# Altium PCB PCB_ESP32-C3-MINI-1_V1.1_20200929.PcbDoc
Units mil, origin at the board's own origin, x right, y up, seen from the top; angles counter-clockwise.
Board outline 519.69 x 653.54 mil, 4 copper layers (Top, Gnd, Power, Bottom), stack 35.4 mil thick; 22 components, 27 nets, 138 pads, 79 vias.
Unrouted connection lines stored in the file: 74.
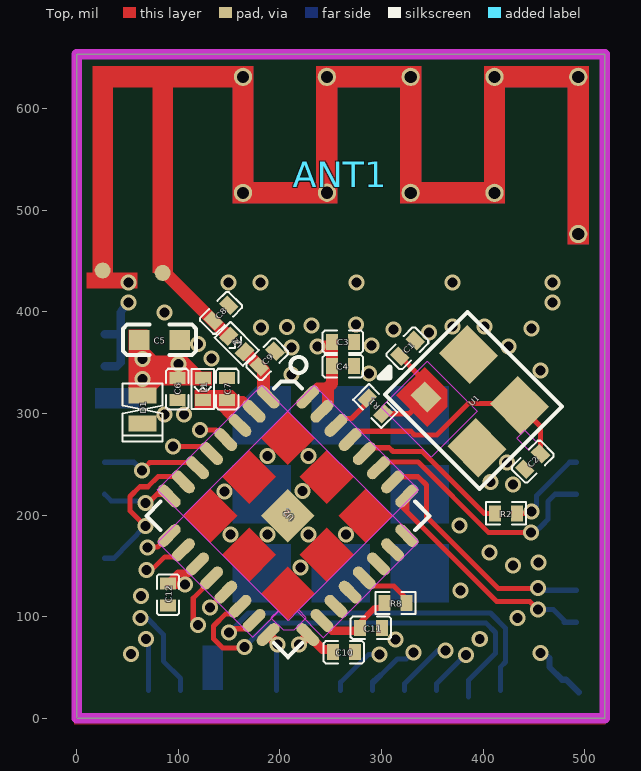
[diagram p0: Top view]
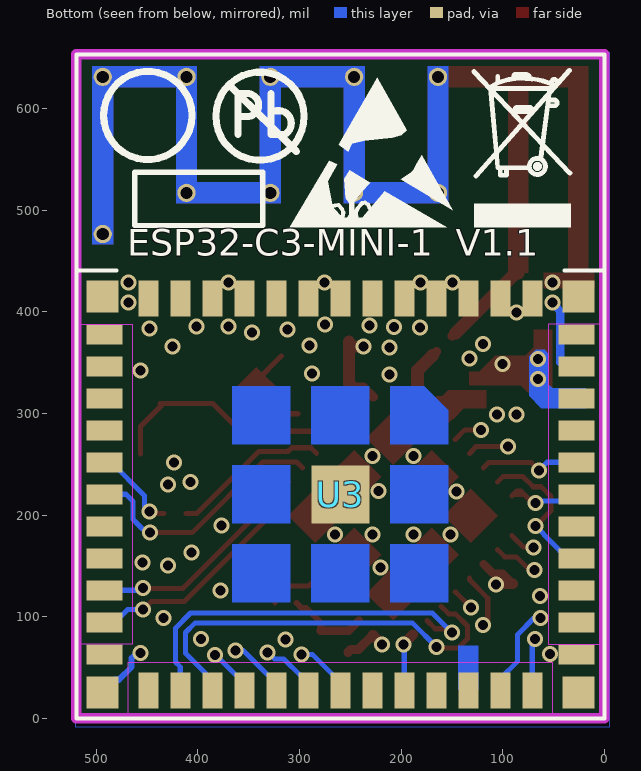
[diagram p1: Bottom view, seen from below]
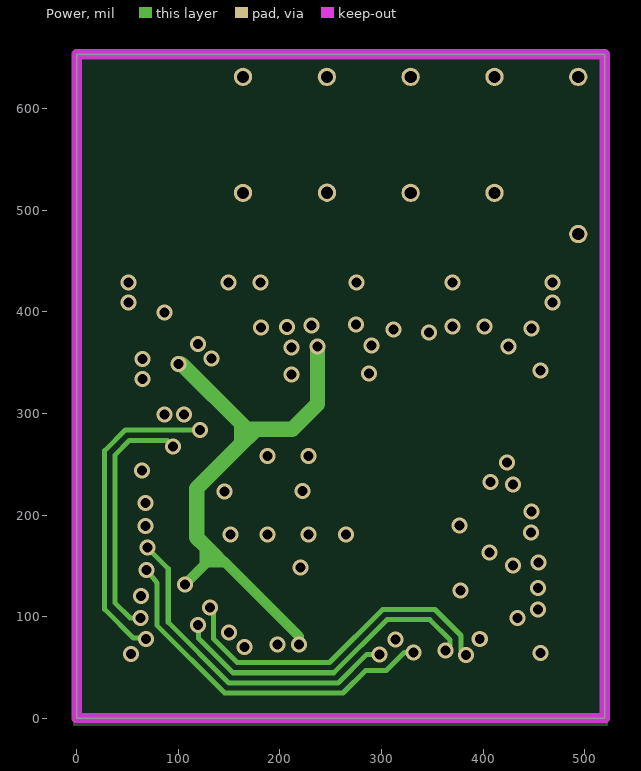
[diagram p2: Power]

## Layer stack, top to bottom
Solder Mask Top: solder mask 0.4, Solder Resist, Dk 3.5
Top: signal copper 1.35
Dielectric 1: dielectric 10, FR-4, Dk 4.3
Gnd: signal copper 1.35
Dielectric2: dielectric 10, FR-4, Dk 4.3
Power: signal copper 1.35
Dielectric3: dielectric 10, FR-4, Dk 4.3
Bottom: signal copper 1.35
Solder Mask Bottom: solder mask 0.4, Solder Resist, Dk 3.5

## Board outline
0,653.54 519.69,653.54 519.69,0 0,0

## Design rules (kind name [scope] priority, off if disabled: settings)
Clearance "Clearance - NetClass - ClearanceClass_2(RuleSet)" [InNetClass('ClearanceClass_2(RuleSet)')] p1: gap=5 ignorepadtopadclearanceinfootprint=FALSE except(0: Arc-Hole Track-Hole SMDPad-Hole THPad-Hole Via-Hole Fill-Hole Poly-Hole Region-Hole Text-Hole; 10: Fill-Fill Fill-Poly Fill-Region Poly-Poly Poly-Region Region-Region Text-Text; 12.2: Arc-Fill Arc-Poly Arc-Region Track-Fill Track-Poly Track-Region SMDPad-Fill SMDPad-Poly SMDPad-Region THPad-Fill THPad-Poly THPad-Region Via-Fill Via-Poly Via-Region)
Clearance "Clearance - Default - DEFAULT- SMD" [IsVia vs IsSMTPin] p2: gap=6 ignorepadtopadclearanceinfootprint=FALSE
Clearance "Clearance - Default - DEFAULT - Via" [IsVia vs IsVia] p3: gap=6 ignorepadtopadclearanceinfootprint=FALSE
Clearance "Clearance - Default - DEFAULT - Net" [All] p4: gap=5 ignorepadtopadclearanceinfootprint=FALSE except(0: Arc-Hole Track-Hole SMDPad-Hole THPad-Hole Via-Hole Fill-Hole Poly-Hole Region-Hole Text-Hole; 7.87: SMDPad-SMDPad SMDPad-THPad THPad-THPad; 10: Fill-Fill Fill-Poly Fill-Region Poly-Poly Poly-Region Region-Region Text-Text)
ComponentClearance "ComponentClearance - Default - DEFAULT" [All] p1: gap=6 collisioncheckmode=3 verticalgap=10 showdistances=FALSE
FanoutControl Fanout_Small [(CompPinCount < 5)] p1: bgadir=Out bgaviamode=Centered fanoutstyle=Auto fanoutdirection=OutThenIn viagrid=1 // Fanout_Small (Default Rule)
FanoutControl Fanout_BGA [IsBGA] p2: bgadir=Out bgaviamode=Centered fanoutstyle=Auto fanoutdirection=Alternating viagrid=1 // Fanout_BGA (Default Rule)
FanoutControl Fanout_LCC [IsLCC] p3: bgadir=Out bgaviamode=Centered fanoutstyle=Auto fanoutdirection=Alternating viagrid=1 // Fanout_LCC (Default Rule)
FanoutControl Fanout_SOIC [IsSOIC] p4: bgadir=Out bgaviamode=Centered fanoutstyle=Auto fanoutdirection=Alternating viagrid=1 // Fanout_SOIC (Default Rule)
HoleToHoleClearance "HoleToHoleClearance - Default - DEFAULT" [All] p1: gap=6 allowstackedmicrovias=TRUE
Length "Default Length" [All] p1: maxlimit=50000 minlimit=0
MaxMinImpedance "Default Impedance" [All] p1: minimum=50.00 maximum=150.0
ParallelSegment "Default Parallel Segment Adjasent" [All] p1: limit=1000 gap=200
ParallelSegment "Default Parallel Segment Same Layer" [All] p2: limit=1000 gap=200
PlaneConnect "Default PlaneConnect" [All] p1: planeconnectstyle=Direct reliefexpansion=20 reliefentries=4 reliefconductorwidth=15 reliefairgap=10
PolygonConnect "PolygonConnect - Default SMT" [IsSMTPin] p1: connectstyle=Direct reliefconductorwidth=10 reliefentries=4 polygonreliefangle="45 Angle" airgapwidth=10
PolygonConnect "PolygonConnect - Default Pad" [All] p2: connectstyle=Direct reliefconductorwidth=15 reliefentries=4 polygonreliefangle="45 Angle" airgapwidth=10
RoutingLayers "RoutingLayers - Default - DEFAULT" [All] p1: top layer_v5=TRUE mid layer 1_v5=TRUE mid layer 2_v5=TRUE bottom layer_v5=TRUE
RoutingPriority "RoutingPriority - Default - DEFAULT" [All] p1: routingpriority=3
RoutingTopology "Default Routing Topology" [All] p1: topology=Shortest
RoutingVias "RoutingVias - Default - DEFAULT" [All] p1: holewidth=9.84 width=15.75 viastyle="Through Hole" minholewidth=9.84 minwidth=15.75 maxholewidth=9.84 maxwidth=15.75
SMDToCorner "SMDToCorner - Default - DEFAULT" [All] p1: distance=60000
SolderMaskExpansion [All] p1: expansion=4 istentingtop=FALSE
Width "Width - NetClass - ClearanceClass_2(RuleSet)" [InNetClass('ClearanceClass_2(RuleSet)')] p1: maxlimit=30 minlimit=5 preferedwidth=12.6
Width "Default Width" [All] p2: maxlimit=30 minlimit=5 preferedwidth=5
18 further rules are at their usual default settings.

## Classes and differential pairs
net class ClearanceClass_2(RuleSet): LNA_IN RF_ANT

## Components (designator, comment, footprint, x,y, rotation, side; value= is the part's Value field where it differs from the comment)
ANT1 "MINI-ANT-TYPED-H" MINI-ANT-TYPED-H 0,653.54 r0 top
C1 "C0201" C0201 325.51,364.15 r45 top
C2 "C0201" C0201 448.81,252.66 r225 top
C3 "C0201" C0201 262,370.6 r0 top
C4 "C0201" C0201 262,346.5 r0 top
C5 "C0402" C0402 81.5,372.39 r0 top
C6 "C0201" C0201 99,324.02 r270 top
C7 "C0201" C0201 148.16,324.02 r90 top
C8 "C0201" C0201 142,399 r225 top
C9 "C0201" C0201 187.5,353.5 r225 top
C10 "C0201" C0201 263,65 r0 top
C11 "C0201" C0201 289.5,89 r0 top
C12 "C0201" C0201 89.9,121.6 r270 top
D1 "SOD882" SOD882 64.96,304 r270 top
L1 "L0201" L0201 124.2,324.02 r90 top
L2 "L0201" L0201 157.5,368.5 r135 top
R1 "R0201" R0201 293.8,307.4 r315 top
R2 "R0201" R0201 422.49,201.7 r0 top
R8 "R0201" R0201 313.78,113.5 r180 top
U1 "XTAL3225" XTAL3225 389.76,312.14 r315 top
U2 "QFN32_0P5_5" QFN32_0P5_5 207.94,199.28 r315 top
U3 "QFN48_0P8_11P8X9P8" QFN48_0P8_11P8X9P8 519.69,0 r180 bottom

## Footprints (in the part's own frame and the unit in brackets; to place one, negate y for a bottom-side part, rotate by r counter-clockwise, add the part's x,y. Pads: shape width x height; smd on the part's side, far side on the other; paste and mask are expansions set on the pad)
C0201 [mm]
  rect 0.3x0.4 smd: 1(-0.275,0) 2(0.275,0)
  silkscreen extent -0.51,-0.28 0.51,0.28
C0402 [mil]
  rect 20x20 smd: 1(-20,0) 2(20,0)
  silkscreen extent -36,-15 36,15
L0201 [mm]
  rect 0.3x0.4 smd: 1(-0.275,0) 2(0.275,0)
  silkscreen extent -0.5,-0.28 0.5,0.28
MINI-ANT-TYPED-H [mil]
  round 15.75 smd paste-7.87: 1(84.62,-215.21) 2(25.56,-212.8)
  round 18 hole 12 mask-9: 3(163.68,-22.25) 4(163.68,-136.43) 5(246.39,-136.23) 6(246.23,-22.25) 7(328.71,-22.25) 8(328.71,-136.42) 9(411.19,-136.42) 10(411.19,-22.25) 11(493.67,-22.25) 12(493.67,-176.97)
  Top region: 15.72,-212.8 35.4,-212.8 35.4,-32.48 74.77,-32.48 74.77,-215.21 94.46,-215.21 94.46,-32.48 153.51,-32.48 153.51,-146.66 256.46,-146.66 256.46,-32.48 318.47,-32.48 318.47,-146.66 421.42,-146.66 421.42,-32.48 483.43,-32.48 483.43,-187.21 503.9,-187.21 503.9,-12.01 400.95,-12.01 400.95,-126.18 338.94,-126.18 338.94,-12.01 235.99,-12.01 235.99,-126.18 173.98,-126.18 173.98,-12.01 15.72,-12.01 15.72,-212.8
  Bottom region: 153.51,-12.01 153.51,-146.66 256.46,-146.66 256.46,-32.48 318.47,-32.48 318.47,-146.66 421.42,-146.66 421.42,-32.48 483.43,-32.48 483.43,-187.21 503.9,-187.21 503.9,-12.01 400.95,-12.01 400.95,-126.18 338.94,-126.18 338.94,-12.01 235.99,-12.01 235.99,-126.18 173.98,-126.18 173.98,-12.01 153.51,-12.01
QFN32_0P5_5 [mm]
  oval 0.7x0.28 smd: 1(-2.45,1.75) 2(-2.45,1.25) 3(-2.45,0.75) 4(-2.45,0.25) 5(-2.45,-0.25) 6(-2.45,-0.75) 7(-2.45,-1.25) 8(-2.45,-1.75) 17(2.45,-1.75) 18(2.45,-1.25) 19(2.45,-0.75) 20(2.45,-0.25) 21(2.45,0.25) 22(2.45,0.75) 23(2.45,1.25) 24(2.45,1.75)
  oval 0.28x0.7 smd: 9(-1.75,-2.45) 10(-1.25,-2.45) 11(-0.75,-2.45) 12(-0.25,-2.45) 13(0.25,-2.45) 14(0.75,-2.45) 15(1.25,-2.45) 16(1.75,-2.45) 25(1.75,2.45) 26(1.25,2.45) 27(0.75,2.45) 28(0.25,2.45) 29(-0.25,2.45) 30(-0.75,2.45) 31(-1.25,2.45) 32(-1.75,2.45)
  rect 0.95x0.95 smd: 33(0,0)
  Top region: -0.9,-0.475 -1.85,-0.475 -1.85,0.475 -0.9,0.475 -0.9,-0.475
  Top region: -0.9,-1.85 -1.85,-1.85 -1.85,-0.9 -0.9,-0.9 -0.9,-1.85
  Top region: 0.475,-1.85 -0.475,-1.85 -0.475,-0.9 0.475,-0.9 0.475,-1.85
  Top region: 0.9,-0.9 1.85,-0.9 1.85,-1.85 0.9,-1.85 0.9,-0.9
  Top region: 1.85,-0.475 0.9,-0.475 0.9,0.475 1.85,0.475 1.85,-0.475
  Top region: 0.9,1.85 1.85,1.85 1.85,0.9 0.9,0.9 0.9,1.85
  Top region: 0.475,0.9 -0.475,0.9 -0.475,1.85 0.475,1.85 0.475,0.9
  Top region: -0.9,0.9 -1.85,0.9 -1.85,1.85 -0.9,1.85 -0.9,0.9
  Top keep-out region: -1.837,-1.85 -1.836,-2.775 1.524,-2.775 1.524,-1.85 -1.837,-1.85
  Top keep-out region: 1.85,1.85 1.85,-1.529 2.775,-1.529 2.775,1.85 1.85,1.85
  Top keep-out region: -2.775,1.85 -1.85,1.85 -1.85,-1.85 -2.775,-1.85 -2.775,1.85
  Top keep-out region: -1.85,1.85 1.85,1.85 1.85,2.775 -1.85,2.775 -1.85,1.85
  silkscreen extent -2.68,-2.5 2.5,3.05
QFN48_0P8_11P8X9P8 [mm]
  rect 0.9x0.5 smd paste-0.05 mask-0.05: 1(12.5,9.6) 2(12.5,8.8) 3(12.5,8) 4(12.5,7.2) 5(12.5,6.4) 6(12.5,5.6) 7(12.5,4.8) 8(12.5,4) 9(12.5,3.2) 10(12.5,2.4) 11(12.5,1.6) 25(0.7,1.6) 26(0.7,2.4) 27(0.7,3.2) 28(0.7,4) 29(0.7,4.8) 30(0.7,5.6) 31(0.7,6.4) 32(0.7,7.2) 33(0.7,8) 34(0.7,8.8) 35(0.7,9.6)
  rect 0.5x0.9 smd paste-0.05 mask-0.05: 12(11.4,0.7) 13(10.6,0.7) 14(9.8,0.7) 15(9,0.7) 16(8.2,0.7) 17(7.4,0.7) 18(6.6,0.7) 19(5.8,0.7) 20(5,0.7) 21(4.2,0.7) 22(3.4,0.7) 23(2.6,0.7) 24(1.8,0.7) 36(1.8,10.5) 37(2.6,10.5) 38(3.4,10.5) 39(4.2,10.5) 40(5,10.5) 41(5.8,10.5) 42(6.6,10.5) 43(7.4,10.5) 44(8.2,10.5) 45(9,10.5) 46(9.8,10.5) 47(10.6,10.5) 48(11.4,10.5)
  rrect0% 1.45x1.45 smd: 49(6.6,5.6)
  rect 0.8x0.8 smd paste-0.05 mask-0.05: 50(0.65,10.55) 51(0.65,0.65) 52(12.55,0.65) 53(12.55,10.55)
  Top region: 9.3,4.35 9.3,2.9 7.85,2.9 7.85,4.35 9.3,4.35
  Top region: 7.325,4.35 7.325,2.9 5.875,2.9 5.875,4.35 7.325,4.35
  Top region: 5.35,4.35 5.35,2.9 3.9,2.9 3.9,4.35 5.35,4.35
  Top region: 5.35,6.325 5.35,4.875 3.9,4.875 3.9,6.325 5.35,6.325
  Top region: 9.3,6.325 9.3,4.875 7.85,4.875 7.85,6.325 9.3,6.325
  Top region: 8.7,8.3 9.3,7.7 9.3,6.85 7.85,6.85 7.85,8.3 8.7,8.3
  Top region: 7.325,8.3 7.325,6.85 5.875,6.85 5.875,8.3 7.325,8.3
  Top region: 5.35,8.3 5.35,6.85 3.9,6.85 3.9,8.3 5.35,8.3
  Top keep-out region: 1.3,-0.008 1.3,1.405 11.895,1.405 11.895,-0.008 1.3,-0.008
  Top keep-out region: 13.211,9.848 11.798,9.848 11.798,1.849 13.211,1.849 13.211,9.848
  Top keep-out region: 0.018,9.855 1.4,9.855 1.4,1.849 0.018,1.849 0.018,9.855
  silkscreen extent 0,0 13.2,16.6
R0201 [mm]
  rect 0.3x0.4 smd: 1(-0.275,0) 2(0.275,0)
  silkscreen extent -0.5,-0.28 0.5,0.28
SOD882 [mm]
  rect 0.4x0.7 smd: 1(-0.35,0) 2(0.35,0)
  silkscreen extent -0.65,-0.5 0.8,0.5
XTAL3225 [mm]
  rect 0.6x0.5 smd: 1(-0.9,-0.75)
  rect 1.1x1 smd: 2(0.9,-0.75) 3(0.9,0.75) 4(-0.9,0.75)
  Top region: -1.45,-0.25 -1.45,-1.25 -0.35,-1.25 -0.35,-0.55 -0.65,-0.25 -1.45,-0.25
  silkscreen extent -2.07,-1.44 1.67,1.48

## Via types
v1: diameter 15.75, hole 9.84, Top to Bottom, 79 vias

## Nets (pads, with @x,y where several pads share a name; then routed paths per layer and width w, separated by ;. In a path a pad name is that pad's centre, name@x,y a point inside that pad or via, vN(x,y) a via of type N, cw(c..) or ccw(c..) an arc to the next point about the centre after c; other vN are vias at no path point)
CHIP_EN: U2.7 U3.8 | length 151.3
  Top w5: v1(67.5,189.3) 52.5,204.3 52.5,218.24 62.16,227.9 70,227.9 79.9,237.8 99.82,237.8 U2.7
  Bottom w5: U3.8 36.8,157.48 v1(67.5,189.3)
GND: ANT1.2 C1.2 C2.2 C3.2 C4.2 C5.2 C6.2 C7.2 C8.1 C9.1 C10.2 C11.2 C12.2 D1.2 U1.2 U1.4 U2.33 U3.1 U3.2 U3.11 U3.14 U3.36 U3.37 U3.38 U3.39 U3.40 U3.41 U3.42 U3.43 U3.44 U3.45 U3.46 U3.47 U3.48 U3.49 U3.50 U3.51 U3.52 U3.53 | length 154.5
  Bottom w6: v1(456.6,64.5) 459.91,64.5 465.36,59.06 465.36,50.39 477.8,37.95 481.74,37.95 U3.51
  Bottom w8: U3.2 39.77,346.46 43.31,350 U3.1@43.31,377.95 ; U3.1 U3.1@43.31,377.95 ; v1(51.18,409.45) 49.61,409.45 43.31,399.21 U3.1@43.31,377.95
  other v1: 53.2,63.4 314,77.7 396.7,78.2 433.75,98.75 63.5,120.4 377.95,125.98 220.5,148.5 429.5,150.3 454.33,153.15 406.1,163 151.5,181 188,181 228.35,180.98 264.9,180.9 376.78,189.7 145.3,223.4 222,223.8 429.19,230.3 407.09,232.5 423.31,251.73 188,258 228.35,257.99 86.6,299.2 105.5,299.2 211.5,338.5 287.6,339.4 456.7,342.52 132.5,354 211.5,365 425.2,366.14 290.2,366.7 119.5,368.5 346.89,379.5 311.58,382.76 181.5,384.5 447.64,383.86 207,385 231,386.5 370.08,385.83 401.58,385.83 274.89,387.8 86.62,399.61 468.51,409.45 51.18,429.13 149.61,429.13 181.11,429.13 275.59,429.13 370.08,429.13 468.51,429.13
GPIO0: U2.4 U3.12 | length 392.1
  Top w5: v1(121.2,283.9) 137.24,283.9 U2.4
  Power w5: v1(68.1,77.9) 67,79 55.76,79 27.5,107.26 27.5,263.4 47.9,283.8 121.2,283.8 v1(121.2,283.9)
  Bottom w5: v1(68.1,77.9) 70.87,75.13 U3.12
GPIO1: U2.5 U3.13 | length 374.6
  Top w5: v1(95,267.5) 126.3,267.5 U2.5
  Power w5: v1(63,98.6) 52.6,98.6 37.5,113.7 37.5,259 51.8,273.3 89.2,273.3 v1(95,267.5)
  Bottom w5: v1(63,98.6) 69.14,98.6 85.3,82.44 85.3,56.2 102.37,39.13 U3.13
GPIO2: U2.6 U3.5 | length 99.8
  Top w5: v1(64.3,244) 71.9,251.6 113.86,251.6 U2.6
  Bottom w5: U3.5 56.33,251.97 v1(64.3,244)
GPIO3: U2.8 U3.6 | length 84.9
  Top w5: v1(67.9,211.9) 70.5,211.9 70.5,212 78.7,220.2 ; U2.8 U2.8@89.58,220.2 ; 78.7,220.2 U2.8@89.58,220.2 ; 78.7,220.2 82.25,223.75 86.03,223.75 U2.8@89.58,220.2
  Bottom w5: U3.6 34.03,214 65.8,214 v1(67.9,211.9)
GPIO4: U2.9 U3.18 | length 409.8
  Top w5: v1(69.5,167.9) 70,168.4 79.63,168.4 U2.9
  Power w5: v1(69.5,167.9) 90.1,147.3 90.1,94.47 149.77,34.8 257.3,34.8 285.1,62.6 v1(298,62.6)
  Bottom w5: U3.18 259.85,35.43 287.01,62.6 v1(298,62.6)
GPIO5: U2.10 U3.19 | length 471.9
  Top w5: v1(68.5,146.1) 73.91,146.1 86.71,158.9 97.96,158.9 U2.10
  Power w5: v1(68.5,146.1) 78.9,133.34 78.9,91.53 145.63,24.8 262.2,24.8 284.5,47.1 304.8,47.1 322.6,64.9 v1(331.7,64.9)
  Bottom w5: U3.19 U3.19@291.34,34.23 ; U3.19@298.68,42.78 291.34,36.4 U3.19@291.34,34.23 ; 308.21,51.1 U3.19@291.34,34.23 ; 308.26,51.1 315.66,58.5 324.5,58.5 331.3,65.3 v1(331.7,64.9)
GPIO6: U2.12 U3.20 | length 433.1
  Top w5: v1(119.3,91.7) 114.7,96.3 114.7,118.2 132.77,136.28 U2.12
  Power w5: v1(119.3,91.7) 119.91,91.09 119.91,78.81 153.91,44.8 253,44.8 305.3,97.1 347.6,97.1 367.6,77.1 367.6,74.1 367.6,71.5 v1(362.9,66.8)
  Bottom w5: U3.20 322.84,34.26 355.38,66.8 v1(362.9,66.8)
GPIO7: U2.13 U3.21 | length 409.9
  Top w5: v1(131.2,109.2) 146.11,124.11 U2.13
  Power w5: v1(131.2,109.2) 132.3,109.43 134.7,107.03 134.7,78.16 158.06,54.8 248.8,54.8 301.1,107.1 352.68,107.1 378.3,81.47 378.3,67.3 383.4,62.2 v1(383.4,62.1)
  Bottom w5: U3.21 354.33,34.23 382.8,62.7 v1(383.4,62.1)
GPIO8: U2.14 U3.22 | length 416.2
  Top w5: U2.14 153.22,102.8 146.65,102.8 134.7,90.84 134.7,78.16 143.76,69.1 164.1,69.1 v1(165.2,70.2)
  Bottom w5: v1(165.2,70.2) 188.6,93.6 403.04,93.6 412.1,84.54 412.1,63.9 385.83,37.63 U3.22 U3.22@385.83,20.87
GPIO9: U2.15 U3.23 | length 378.5
  Top w5: v1(150.1,84.5) 153.7,88.1 166.36,88.1 U2.15
  Bottom w5: v1(150.1,84.5) 169.2,103.6 407.19,103.6 422.1,88.69 422.1,55.4 417.33,50.63 U3.23
GPIO10: U2.16 U3.16 | length 58.8
  Top w5: v1@196.5,73.5 v1(197.5,72.5)
  Top w10: U2.16 196.5,74.3 v1@196.5,73.5
  Bottom w5: U3.16 196.85,71.85 v1(197.5,72.5)
GPIO18: U2.25 U3.26 | length 248.9
  Top w5: v1(453.8,107.1) 445.9,115 413.4,115 324.86,203.54 ; 324.86,203.54 319.39,209.01 319.39,213.29 319.39,214 324.15,218.77 U2.25 324.86,213.29 324.86,203.54
  Bottom w5: v1(453.8,107.1) 469.1,107.1 479.9,96.3 479.9,94.49 U3.26
GPIO19: U2.26 U3.27 | length 248.2
  Top w5: U2.26 315.96,237.7 336.02,237.7 344.19,229.54 344.19,198.36 414.62,127.92 454,127.92 v1(454,128.2)
  Bottom w5: v1(454,128.2) 456.22,125.98 U3.27
LNA_IN: C9.2 L2.1 U2.1 | length 54.6
  Top w9: L2.1 L2.1@169,357 ; C9.2 C9.2@179.84,346.16 ; U2.1@183.8,322.25 188.45,317.6 U2.1
  Top w12.6: L2.1@169,357 179.84,346.16 183.8,342.2 U2.1@183.8,322.25
N5334642: C7.1 L1.1 U2.2 U2.3 | length 85.4
  Top w5: C7.1@148.16,312.03 148.28,311.92 C7.1@148.28,311.53 ; C7.1 147.72,312.03 147.52,311.53 147.48,311.41 C7.1@147.05,310.3 ; U2.3@159.24,290.08 160.35,288.98 U2.3@160.61,288.71 ; U2.3@160.61,288.98 U2.3@160.61,288.71 ; U2.2@171.08,305.73 U2.2 ; C7.1@147.05,310.3 144.46,307.71 146.43,305.73 148.16,304 148.28,303.88 148.28,304 148.28,305.73 148.28,307.71 148.28,310.3 148.28,311.41 C7.1@148.28,311.53 ; C7.1@147.05,310.3 148.16,311.41 C7.1@148.28,311.53 ; U2.3@160.61,288.71 U2.3 U2.3@160.61,288.71
  Top w8: U2.3@160.61,288.98 159.51,290.08 159.24,290.08 150.44,298.89 148.16,301.16 148.16,304 148.16,305.73 148.16,307.71 148.16,310.3 148.16,311.41 148.16,311.53 148.16,312.03 C7.1 160.4,313.19 163.63,313.19 165.79,311.02 U2.2@171.08,305.73
N5601133: C2.1 U1.3 U2.29 | length 245
  Top w5: U2.29 277.24,282.5 328.75,282.5 332.5,278.75 354.34,278.75 385.59,310 437.43,310 U1.3 456.46,287.2 C2.1
N15917924: R2.1 U2.28 | length 157.7
  Top w5: U2.28 288.83,266.25 307.5,266.25 311.25,262.5 340,262.5 400.8,201.7 R2.1
N16619403: C1.1 R1.2 U1.1 | length 106.1
  Top w5: R1.2 326.7,299.74 326.96,300 327.51,300 U1.1 348.15,316.48 348.15,317.76 348.15,321.32 343.88,325.59 343.88,330.46 C1.1
N16918436: R1.1 U2.30 | length 44.5
  Top w5: U2.30 261.9,295 270.5,295 283.8,308.3 283.8,312.71 R1.1
RF_ANT: ANT1.1 C8.2 L2.2 | length 91.2
  Top w9: C8.2@134.34,391.1 C8.2 ; L2.2@146.44,379 147,379 L2.2
  Top w12.6: ANT1.1 87.11,438.33 134.34,391.1 L2.2@146.44,379
SPICS0: R8.1 U2.21 | length 53.8
  Top w5: U2.21 290.94,130.2 312.1,130.2 323.93,118.37 R8.1@323.93,113.5
U0RXD: U2.27 U3.30 | length 252.5
  Top w5: U2.27 302.87,252.45 335.84,252.45 405.59,182.7 v1(446.99,182.7)
  Bottom w5: v1(446.99,182.7) 450.79,182.7 458.44,190.35 463.69,195.57 463.69,213.47 470.69,220.47 U3.30
U0TXD: R2.2 U3.31 | length 87
  Top w5: R2.2 447.5,201.7 v1(447.5,203.75)
  Bottom w5: v1(447.5,203.75) 452.7,208.95 452.7,219.38 485.28,251.97 U3.31
VDD33: C3.1 C4.1 C5.1 C6.1 C10.1 C12.1 D1.1 L1.2 U2.11 U2.17 U2.31 U2.32 U3.3 | length 883.6
  Top w5: v1@58.23,331.12 v1(65,333.75) ; U2.11@116.23,151.95 U2.11 ; 247.48,314.08 247.48,314.97
  Top w8: C12.1 99.94,142.47 109.37,142.47 U2.11
  Top w9: U2.17 228.02,81.77 242.08,67.7 249.47,67.7 C10.1 ; U2.32 237.13,325.9 247.48,325.9 ; U2.31 247.57,308.51 247.57,311.19 247.57,314.08 247.57,314.88 247.48,314.97
  Top w10: C12.1 106.07,132.43 v1(106.6,131.9) ; v1(218.75,72.5) U2.17@228.02,81.77
  Top w12: v1(237,366) C3.1@251.17,366 ; U2.31@247.48,311.19 247.48,314.08 ; 247.48,314.97 247.48,322.05 247.48,325.7 ; 247.48,325.9 247.48,325.7 ; C3.1 C3.1@251.17,366 ; 247.48,325.7 247.68,325.9 251.17,329.39 C4.1 C3.1@251.17,366
  Power w5: 129.71,166.26 130.6,166.26
  Power w10: v1(106.6,131.9) 126.1,151.4 126.1,153.31 ; 126.66,169.31 126.1,168.75 126.1,166.26 126.1,160.64 126.1,158.27 126.1,153.31 ; 130.6,166.26 132.85,166.26 ; 135.34,160.64 132.98,158.27 135,156.25 135,153.31 ; v1(218.75,72.5) 218.75,80.61 146.06,153.31 ; 126.1,153.31 135,153.31 ; 132.85,166.26 138.47,160.64 140.84,158.27 145.81,153.31 ; 132.85,166.26 133.1,166.26 138.72,160.64 141.09,158.27 146.06,153.31 ; 135,153.31 145.81,153.31 ; 145.81,153.31 146.06,153.31
  Power w15: v1(100.2,348.8) 103.16,348.8 167.37,284.6 ; 135.34,160.64 129.71,166.26 126.66,169.31 118.1,177.87 118.1,226.07 162.31,270.28 ; v1(237,366) 237,309.17 212.26,284.6 176.63,284.6 ; 162.31,270.28 162.31,272.84 162.31,278.48 162.31,286.69 164.88,284.12 ; 162.31,270.28 164.88,272.84 ; 164.88,272.84 170.52,278.48 ; 164.88,272.84 164.88,278.48 164.88,279.97 164.88,284.12 ; 164.88,284.12 169.03,279.97 170.52,278.48 ; 164.88,284.12 165.36,284.6 167.37,284.6 ; 167.37,284.6 167.84,284.12 172,279.97 ; 167.37,284.6 176.63,284.6 ; 170.52,278.48 172,279.97 ; 172,279.97 176.16,284.12 176.63,284.6
  other v1: 65,353.75
VDD_SPI: C11.1 R8.2 U2.18 | length 83.1
  Top w6: C11.1 278.17,89 278.17,93.3 293.57,108.7 298.15,108.7 R8.2
  Top w8: U2.18 251.41,86.21 278.96,86.21 279.17,86 C11.1
pads on no net: ANT1.3 ANT1.4 ANT1.5 ANT1.6 ANT1.7 ANT1.8 ANT1.9 ANT1.10 ANT1.11 ANT1.12 U2.19 U2.20 U2.22 U2.23 U2.24 U3.4 U3.7 U3.9 U3.10 U3.15 U3.17 U3.24 U3.25 U3.28 U3.29 U3.32 U3.33 U3.34 U3.35

## Polygon pours and split planes (outlines as drawn)
GND on Gnd (solid, remove dead copper, pour order 0): -4.2,652.2 522.84,652.2 522.84,-7.31 -4.2,-7.31
GND on Bottom (solid, remove dead copper, pour order 1): -5.35,655.1 520.72,655.1 520.72,-8.48 -5.35,-8.48
GND on Power (solid, remove dead copper, pour order 2): -2.45,652.2 521.47,652.2 521.47,-6.73 -2.45,-6.73
GND on Top (solid, remove dead copper, pour order 3): -2.17,652.9 519.96,652.9 519.96,-5.87 -2.17,-5.87

## Keep-outs
Top:
  region: 433.07,275.59 444.88,263.78 452.76,271.65 440.94,283.46 433.07,275.59
  region: 344.88,351.57 394.09,302.36 348.82,257.09 299.61,306.3 344.88,351.57
  region: 218.65,106.65 208,96 198.2,105.8 191.2,98.8 203.1,86.9 213.9,86.9 226.15,99.15 218.65,106.65
Keep-Out Layer:
  the board outline again, w10

## Other copper
Top:
  region net VDD33: 51,382.41 51,324.41 61.35,314.06 67.77,314.06 67.95,313.88 82.04,327.97 132.78,327.97 132.78,341 122.92,341 107.32,356.6 77.76,356.6 69.32,365.05 69.32,382.41 51,382.41
  region net GND: 10.02,423.3 10.02,438.35 15.7,438.34 15.7,454.06 35.4,454.06 35.4,438.35 59.8,438.35 59.8,423.3 10.02,423.3
  region net N5334642: 116.2,322.77 153.61,322.77 165.35,311.02 148.82,294.49 138.18,305.13 116.2,305.13 116.2,322.77
Bottom:
  region net GND: 143.6,28.3 124,28.3 124,71.25 143.6,71.25 143.6,28.3
  region net VDD33: 18.11,324.8 50.79,324.8 54.92,328.94 54.92,358.67 58.75,362.5 67.61,362.5 74.02,356.1 74.02,317.32 61.81,305.12 18.11,305.12 18.11,324.8

## Silkscreen, mask and mechanical layers (free items; w line width, h text height)
Silkscreen Bottom:
  text "ESP32-C3-MINI-1  V1.1" at 469.49,446.6 h45
Paste Mask Top:
  lines w23.62: 51.18,413.38 27.56,413.38 27.56,27.56 492.13,27.56 492.13,413.38 185.04,413.38
Solder Mask Top:
  lines w23.62: 51.18,413.39 27.56,413.39 27.56,27.56 492.13,27.56 492.13,413.39 185.04,413.39
Layer_125:
  lines w1: 0,0 0.03,0 ; 0,653.54 0.03,653.54 ; 0,686.22 0.03,686.22 ; 6.79,-235.75 512.72,-235.75 ; 7.4,-335.75 512.72,-335.75 ; 7.4,-305.75 512.72,-305.75 ; 7.72,-275.75 512.72,-275.75 ; 27.56,27.56 27.59,27.56 ; 27.56,56.3 27.59,56.3 ; 27.56,87.79 27.59,87.79 ; 61.47,-365.75 61.47,-275.75 ; 262.72,-365.75 262.72,-335.75 ; 347.72,-335.75 347.72,-305.75 ; 492.13,27.56 492.15,27.56 ; 492.13,27.56 492.15,27.56 ; 6.79,-365.75 6.79,-195.75 512.72,-195.75 512.72,-365.75 6.79,-365.75 ; 492.13,413.39 492.15,413.39 ; 519.69,686.22 519.71,686.22
  lines w5: -344.01,0 -20,0 ; -344.01,653.54 -20,653.54 ; -324.01,278.02 -324.01,0 ; -324.01,375.52 -324.01,653.54 ; -77.09,56.3 7.56,56.3 ; -77.09,87.79 7.56,87.79 ; -57.09,-13.7 -57.09,56.3 ; -57.09,157.79 -57.09,87.79 ; 0,706.22 0,829.96 ; 27.56,-126.99 27.56,7.56 ; 144.05,809.96 0,809.96 ; 149.16,-106.99 27.56,-106.99 ; 370.52,-106.99 492.13,-106.99 ; 375.64,809.96 519.69,809.96 ; 492.13,-126.99 492.13,7.56 ; 512.13,27.56 699.74,27.56 ; 512.13,413.39 699.74,413.39 ; 519.69,706.22 519.69,829.96 ; 679.74,171.72 679.74,27.56 ; 679.74,269.22 679.74,413.39 ; -324.01,0 -314.01,50 -334.01,50 -324.01,0 ; -324.01,653.54 -334.01,603.54 -314.01,603.54 -324.01,653.54 ; -57.09,56.3 -67.09,6.3 -47.09,6.3 -57.09,56.3 ; -57.09,87.79 -47.09,137.79 -67.09,137.79 -57.09,87.79 ; 0,809.96 50,799.96 50,819.96 0,809.96 ; 27.56,-106.99 77.56,-116.99 77.56,-96.99 27.56,-106.99 ; 492.13,-106.99 442.13,-96.99 442.13,-116.99 492.13,-106.99 ; 519.69,809.96 469.69,819.96 469.69,799.96 519.69,809.96 ; 679.74,27.56 689.74,77.56 669.74,77.56 679.74,27.56 ; 679.74,413.39 669.74,363.39 689.74,363.39 679.74,413.39
  text "13.20mm" at 174.05,791.21 h25
  text "16.60mm" at -408.67,308.02 h25
  text "9.80mm" at 602.46,201.72 h25
  text "0.80mm" at -242.77,139.04 h25
  text "11.80mm" at 179.16,-125.74 h25
  text "ESPRESSIF SYSTEMS" at 22.72,-223.25 h25
  text "ÀÖöÎÐÅÏ¢¿Æ¼¼£¨ÉÏº££©¹É·ÝÓÐÏÞ¹«Ë¾" at 20.22,-260.75 h20
  text "Title" at 15.22,-295.75 h20
  text "ESP32-C3-MINI-1" at 80.22,-295.75 h20
  text "Task" at 12.72,-325.75 h20
  text "Rev" at 357.72,-325.75 h20
  text "1.1" at 442.72,-325.75 h20
  text "Date" at 15.22,-355.75 h20
  text "Tue, Sep 29, 2020" at 80.22,-355.75 h20
  text "Proprietary" at 280.22,-355.75 h20